# EAGLE board coqui-dip-simple (EAGLE 7.1.0)
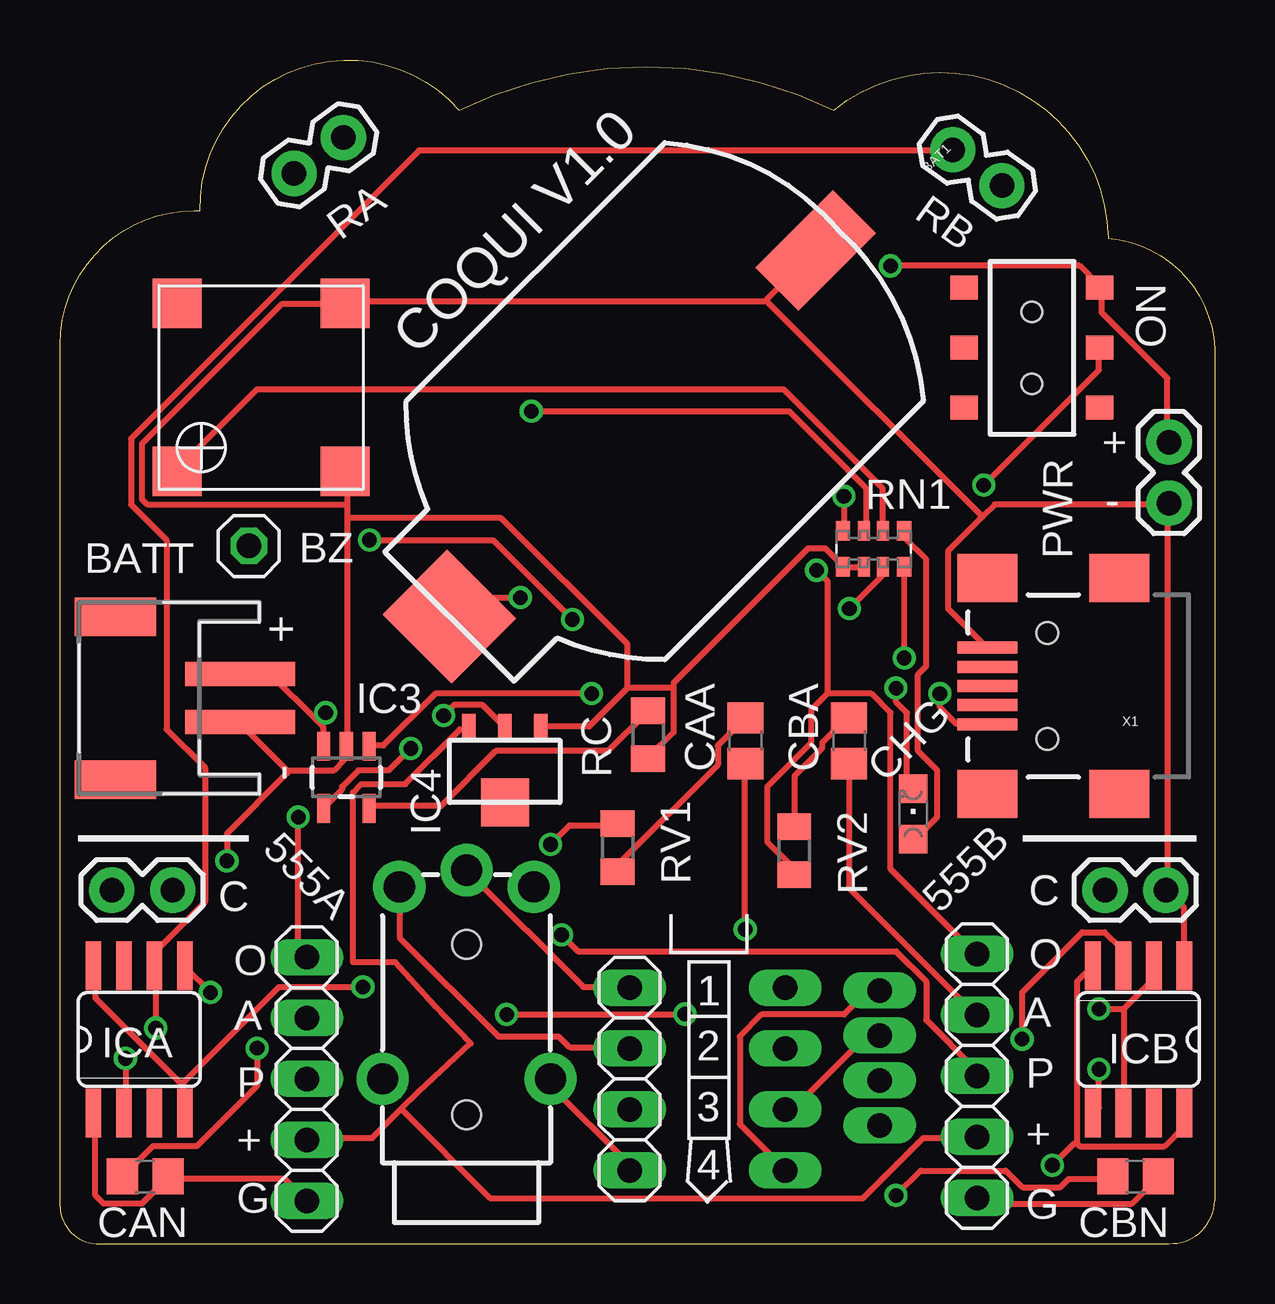
[diagram p0: board, top side]
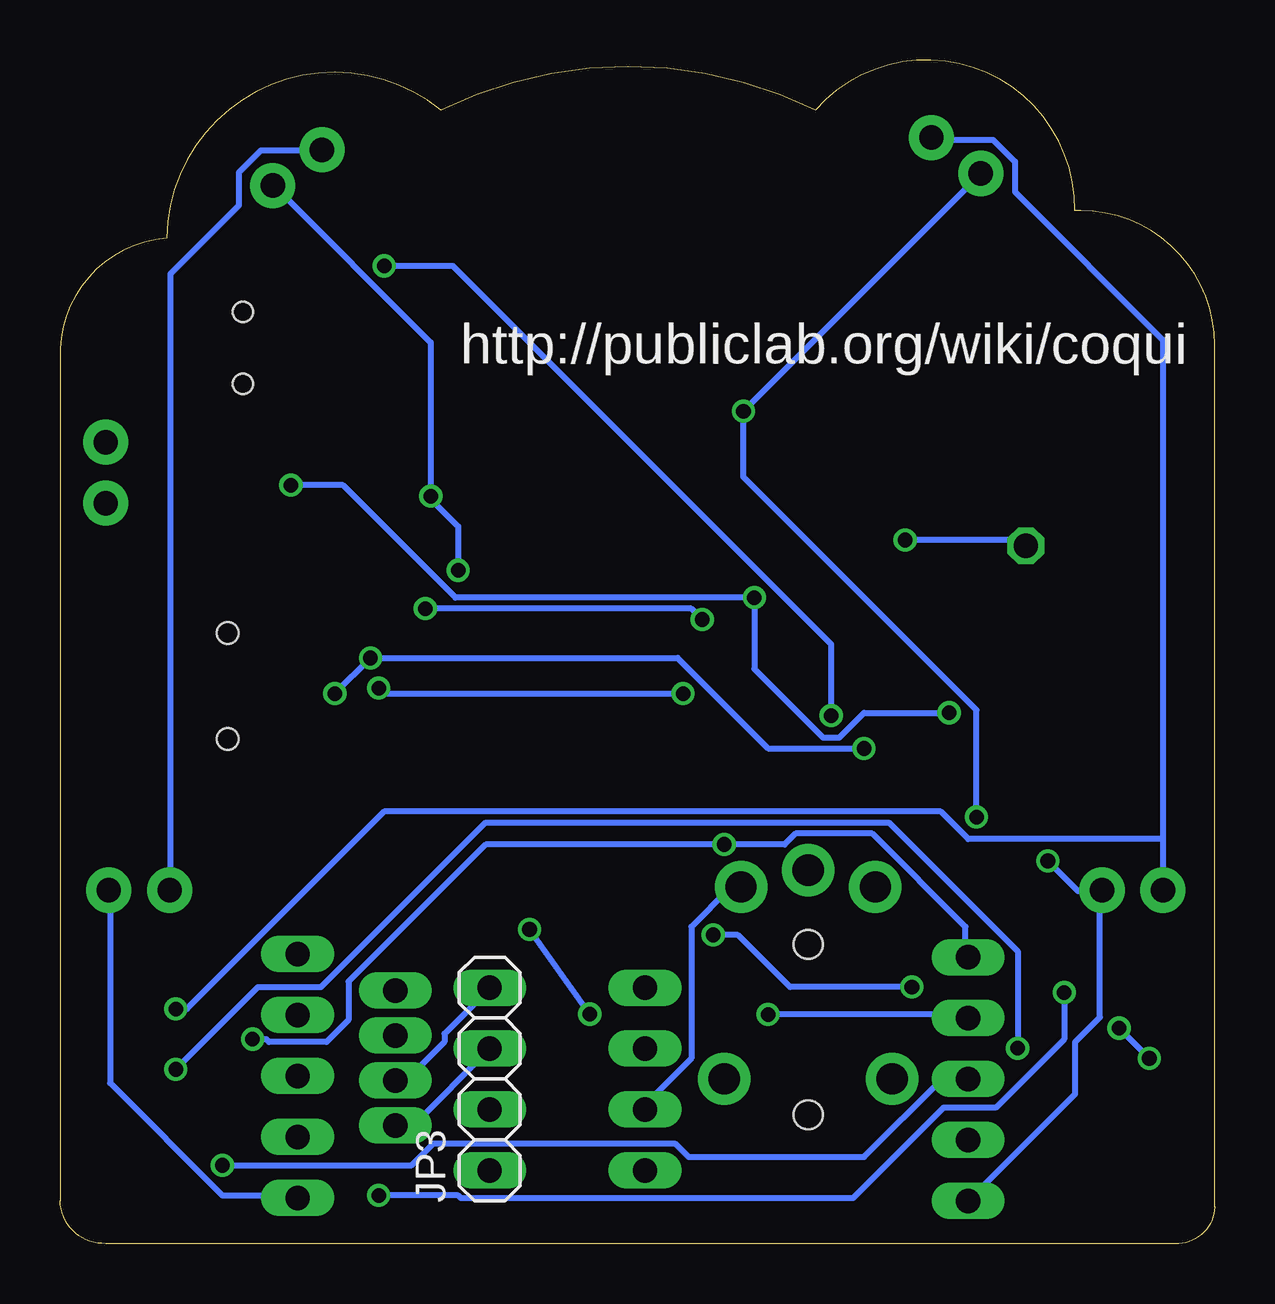
[diagram p1: board, bottom side, seen from below]

Size 48.13 x 49.34 mm. Coordinates in mm from the lower left corner, seen from the top.
Outline: 5.84,43.05 arc-140 16.64,47.24 arc-52 32.26,47.24 arc-128 43.69,41.91 arc-88 48.13,36.83 48.13,1.78 arc-90 46.23,0 1.65,0 arc-90 0,1.52 0,37.46 arc-90 5.59,43.05 5.84,43.05
Copper layers (1*16): Top 0.0356mm / dielectric 1.5011mm / Bottom 0.0356mm
Design rules "oshpark-2layer": minimum track width 6mil, minimum drill 13mil, track to track 6mil, track to pad 6mil, pad to pad 6mil, via to via 6mil, smd to smd 6mil, copper to edge 15mil, drill to drill 6mil, minimum pad ring 7mil, minimum via ring 7mil, stop-mask expansion 4mil, vias tented up to drill 0mil, thermal gap 10mil
Net classes: 0 default: width 0.254 mm, clearance 0.203 mm; 1 power: width 0.254 mm, clearance 0.178 mm

## Footprints (pad centres in the part's own frame; a part is rotated, then mirrored left to right if it is on the bottom)
BATTCOM_20MM_PTH_SMT = smd 4.572 x 2.54: P$1 0,0 | smd 3.81 x 4.064: P$2 21.59,0
JST-PH-2-SMT-RA = smd 1 x 4.6: 1 1,-3.7; 2 -1,-3.7 | smd 1.6 x 3.4: NC1 -3.4,1.5; NC2 3.4,1.5
1X01 = drill 1.016 octagon: 1 0,0
1X02 = drill 1.016 pad 1.88: 1 0,0; 2 2.54,0
C0805 = smd 1.3 x 1.5: 1 -0.95,0; 2 0.95,0
CHIPLED_0805 = smd 1.2 x 1.2: A 0,-1.05; C 0,1.05
SOT23-5 = smd 0.55 x 1.2: 1 -0.95,-1.3; 2 0,-1.3; 3 0.95,-1.3; 4 0.95,1.3; 5 -0.95,1.3
SOT89 = smd 0.58 x 1.2: 1 -1.5,-1.8; 2 0,-1.8; 3 1.5,-1.8 | smd 2 x 2: 4 0,1.3
SO08 = smd 0.66 x 2.032: 1 -1.905,-3.073; 2 -0.635,-3.073; 3 0.635,-3.073; 4 1.905,-3.073; 5 1.905,3.073; 6 0.635,3.073; 7 -0.635,3.073; 8 -1.905,3.073
AYZ0202 = smd 1 x 1.15: 1 -2.5,2.825; 2 0,2.825; 3 2.5,2.825; 4 -2.5,-2.825; 5 0,-2.825; 6 2.5,-2.825 | hole 0.85: 1.5,0; -1.5,0
MJ-2135 = drill 1.3 pad 2.184: 1 0,8.5; 1@2 7,8.5; 2 0.7,0.5; 3 6.3,0.5; 4 3.5,-0.2 | hole 1.2: 3.5,2.9; 3.5,10
1X04/90 = drill 1.016 long: 1 2.928,-2.286; 2 1.053,-2.286; 3 -2.697,-2.286; 4 -0.822,-2.286
1X04 = drill 1.016 long: 1 -3.81,0; 2 -1.27,0; 3 1.27,0; 4 3.81,0
1X05 = drill 1.016 long: 1 -5.08,0; 2 -2.54,0; 3 0,0; 4 2.54,0; 5 5.08,0
R0805 = smd 1.1 x 1.4: 1 -1,0; 2 1,0
EXB38V = smd 0.6 x 0.8: 1 -1.275,-0.75; 4 1.275,-0.75; 5 1.275,0.75; 8 -1.275,0.75 | smd 0.5 x 0.8: 2 -0.4,-0.75; 3 0.4,-0.75; 6 0.4,0.75; 7 -0.4,0.75
SMT-8585-BUZZER = smd 2.05 x 2.05: + -3.5,-3.5; - 3.5,-3.5; A- 3.5,3.5; NC1 -3.5,3.5
USB-MINIB = smd 2.5 x 0.5: D+ 2.5,0; D- 2.5,0.8; GND 2.5,-1.6; ID 2.5,-0.8; VBUS 2.5,1.6 | smd 2.5 x 2: GND@1 -3,-4.5; GND@2 -3,4.5; GND@3 2.5,4.5; GND@4 2.5,-4.5 | hole 0.9: 0,2.2; 0,-2.2

## Placement (x,y rotation side)
BAT1  LIR2032  [BATTCOM_20MM_PTH_SMT]  31.5,41.4 225 top
BATT  [JST-PH-2-SMT-RA]  3.81,22.73 90 top
BZ  [1X01]  7.87,29.08 0 top
CA  M02PTH  [1X02]  4.7,14.73 180 top
CAA  0.01uF  [C0805]  28.58,20.96 90 top
CAN  0.01uF  [C0805]  3.56,2.79 180 top
CB  M02PTH  [1X02]  46.1,14.73 180 top
CBA  0.01uF  [C0805]  32.89,20.96 90 top
CBN  0.01uF  [C0805]  44.83,2.79 180 top
CHG  0805  [CHIPLED_0805]  35.56,17.91 0 top
IC3  MCP73831  [SOT23-5]  11.94,19.43 180 top
IC4  MCP1700-33  [SOT89]  18.54,19.69 180 top
ICA  LM555D  [SO08]  3.3,8.51 0 top
ICB  LM555D  [SO08]  44.96,8.51 180 top
J1  AYZ0202  [AYZ0202]  40.51,37.34 270 top
J-FEMALE  MJ-2135  [MJ-2135]  20.45,15.37 180 top
JP1  [1X04/90]  31.88,7.62 90 top
JP3  [1X04]  30.23,6.86 90 bottom
JP4  [1X04]  23.75,6.86 90 top
JP5  [1X05]  10.29,6.86 90 top
JP6  [1X05]  38.23,6.98 90 top
PWR  M02PTH  [1X02]  46.23,33.4 270 top
RA  M02PTH  [1X02]  11.81,46.1 216 top
RB  M02PTH  [1X02]  37.21,45.59 324 top
RC  22K  [R0805]  24.51,21.21 90 top
RN1  [EXB38V]  33.91,28.96 180 top
RV1  22K  [R0805]  23.24,16.51 90 top
RV2  22K  [R0805]  30.61,16.38 270 top
U$1  BUZZER  [SMT-8585-BUZZER]  8.38,35.69 0 top
X1  USBSMD  [USB-MINIB]  41.15,23.24 180 top

## Library data of the parts
BAT1 IC3 J1 = SparkFunNew
BATT IC4 ICA ICB U$1 = adafruit
BZ JP3-JP6 = pinhead
CA CB PWR RA RB = SparkFun-Connectors
CAA CAN CBA CBN = rcl
CHG = led
J-FEMALE = iPhoneSoftModem
JP1 = trrs-dwb
RC RV1 RV2 = adafruit2013
RN1 = resistor-dil; OC_FARNELL: unknown; OC_NEWARK: unknown
X1 = SparkFun

## Nets
AOUT: ICB.3 JP5.5 RA.2 RN1.3 RV1.2
BOUT: JP6.5 RB.2 RN1.4 RV2.2
GND: BAT1.P$1 BATT.2 CA.1 CAN.1 CB.1 CBN.1 IC3.2 IC4.1 ICA.1 ICB.1 JP5.1 JP6.1 PWR.2 RC.1 RN1.5 RN1.6 U$1.- U$1.A- X1.GND
N$1: J-FEMALE.1 JP4.1
N$2: J-FEMALE.2 JP4.2
N$3: IC3.5 RC.2
N$4: J-FEMALE.3 JP4.3
N$5: CHG.C IC3.1
N$6: J-FEMALE.4 JP4.4
N$7: BZ.1 RN1.7
N$8: CHG.A RN1.1
N$9: CAA.1 JP5.4
N$10: CAA.2 RV1.1
N$11: CA.2 ICB.2 ICB.6 RA.1
N$12: RN1.2 U$1.+
N$13: CBA.2 RV2.1
N$14: CAN.2 ICB.5
N$15: CBN.2 ICA.5
N$16: CB.2 ICA.2 ICA.6 RB.1
N$17: CBA.1 JP6.4
N$18: JP1.1 JP3.1
N$19: JP1.2 JP3.2
N$20: JP1.3 JP3.3
N$21: JP1.4 JP3.4
VAIN: ICB.4 ICB.8 JP5.3
VBAT [power]: BAT1.P$2 BATT.1 IC3.3 J1.2
VBIN: ICA.4 ICA.8 JP6.3
VBUS [power]: IC3.4 RN1.8 X1.VBUS
VCC: IC4.3 JP5.2 JP6.2
VDD: IC4.2 J1.1 PWR.1

## Tracks (layer width: path | path; a pad name or v marks a point on that pad's centre or on a via)
AOUT  (via drill 0.61)
  Top 0.254: v19.65,34.7 30.39,34.7 33.59,31.5 33.59,29.78 RN1.3 | v20.45,16.64 21.25,17.44 23.19,17.44 RV1.2 | v40.11,8.52 40.11,10.46 42.62,12.98 43.54,12.98 44.22,12.29 44.22,11.61 ICB.3 | v9.93,17.78 9.93,12.29 JP5.5
  Bottom 0.254: RA.2 9.82,44.53 v19.65,34.7 19.65,31.95 9.93,22.24 v9.93,17.78 | JP5.5 10.39,11.95 10.39,13.21 14.28,17.09 17.48,17.09 17.93,16.64 v20.45,16.64 30.39,16.64 36.11,10.92 36.11,9.32 37.02,8.41 39.42,8.41 39.53,8.52 v40.11,8.52
BOUT  (via drill 0.61)
  Top 0.254: 31.99,22.92 31.31,22.24 31.31,20.87 29.48,19.04 29.48,16.75 30.51,15.72 30.51,15.49 RV2.2 | 31.99,22.92 33.82,22.92 34.62,22.12 34.62,15.61 38.16,12.06 JP6.5 | v32.68,31.15 32.68,29.78 RN1.4 | 31.99,22.92 31.99,27.61 v31.53,28.07
  Bottom 0.254: RB.2 39.19,44.07 32.68,37.55 v32.68,31.15 32.68,31.04 31.53,29.9 v31.53,28.07
GND  (via drill 0.61)
  Top 0.254: JP5.1 10.27,1.78 9.36,2.69 4.56,2.69 CAN.1 4.45,2.69 3.42,1.66 1.82,1.66 1.47,2.01 1.47,5.44 ICA.1 | 9.47,19.72 11.42,19.72 11.87,20.18 11.87,20.64 IC3.2 11.99,20.75 11.99,30.24 | 9.47,19.72 7.53,21.67 BATT.2 | 11.99,30.24 11.99,30.81 | 11.99,30.81 11.99,32.18 U$1.- | RN1.6 33.48,28.18 32.68,28.18 RN1.5 32.56,28.3 31.88,28.98 31.19,28.98 25.59,23.38 25.59,23.15 | 25.59,23.15 25.59,21.32 24.56,20.3 RC.1 | 23.65,23.15 22.05,21.55 20.1,21.55 IC4.1 | 25.59,23.15 23.65,23.15 | 11.99,30.24 18.39,30.24 23.65,24.98 23.65,23.15 | v6.96,15.95 6.96,17.09 9.47,19.61 9.47,19.72 | 29.36,39.27 11.99,39.27 U$1.A- 11.76,39.15 9.25,39.15 3.42,33.32 3.42,31.04 3.65,30.81 11.99,30.81 | BAT1.P$1 29.36,39.27 | CBN.1 45.71,2.69 44.68,1.66 38.51,1.66 38.28,1.89 JP6.1 | ICB.1 46.85,11.61 46.85,14.01 46.16,14.69 CB.1 46.16,14.81 46.16,30.7 PWR.2 46.16,30.81 38.96,30.81 38.45,30.3 | 38.45,30.3 37.02,28.87 37.02,26.47 38.62,24.87 X1.GND | 38.45,30.3 29.48,39.27 29.36,39.27
  Bottom 0.254: JP5.1 10.27,1.78 5.82,6.24 5.82,8.41 4.79,9.44 4.79,14.69 CA.1 4.9,14.69 5.7,14.69 v6.96,15.95 | JP6.1 38.28,2.01 41.36,2.01 46.05,6.69 46.05,14.69 CB.1
N$1
  Top 0.254: J-FEMALE.1 20.45,6.58 23.65,3.38 23.65,3.15 JP4.1
N$2
  Bottom 0.254: JP4.2 23.65,5.66 23.65,5.89 21.82,7.72 21.82,13.21 20.22,14.81 19.76,14.81 J-FEMALE.2
N$3
  Top 0.254: IC3.5 12.9,18.24 15.88,18.24 18.16,20.52 22.85,20.52 24.45,22.12 RC.2
N$4
  Top 0.254: JP4.3 23.65,8.18 21.25,8.18 20.79,8.64 18.27,8.64 14.16,12.75 14.16,14.81 J-FEMALE.3
N$5  (via drill 0.61)
  Top 0.254: v22.16,22.92 15.65,22.92 13.47,20.75 12.9,20.75 IC3.1 | v34.85,23.15 34.85,22.58 35.31,22.12 35.31,19.27 35.53,19.04 CHG.C
  Bottom 0.254: v22.16,22.92 34.62,22.92 v34.85,23.15
N$6
  Top 0.254: JP4.4 23.65,10.69 21.82,10.69 17.02,15.49 J-FEMALE.4
N$7  (via drill 0.61)
  Top 0.254: v32.91,26.47 34.28,27.84 34.28,28.18 RN1.7 | v21.36,26.01 18.05,29.32 v12.9,29.32
  Bottom 0.254: v32.91,26.47 21.82,26.47 v21.36,26.01 | v12.9,29.32 8.1,29.32 BZ.1
N$8
  Top 0.254: RN1.1 35.19,29.67 35.19,29.44 36.11,28.52 36.11,24.07 35.76,23.72 35.76,20.52 36.56,19.72 36.56,17.78 35.65,16.87 CHG.A
N$9  (via drill 0.61)
  Top 0.254: v28.56,13.09 28.56,19.95 CAA.1 | v26.05,9.56 25.02,9.55 v18.62,9.55
  Bottom 0.254: v26.05,9.56 v28.56,13.09 | v18.62,9.55 10.5,9.55 10.39,9.44 JP5.4
N$10
  Top 0.254: RV1.1 23.3,15.61 23.3,15.84 27.42,19.95 27.42,20.75 28.56,21.9 CAA.2
N$11  (via drill 0.61)
  Top 0.254: 44.34,9.78 ICB.6 | 44.34,9.78 45.59,11.04 ICB.2 | v43.31,9.78 44.34,9.78
  Bottom 0.254: 2.16,16.87 2.16,37.67 8.33,43.84 8.33,45.1 9.25,46.01 11.76,46.01 RA.1 | 2.16,16.87 CA.2 | v43.31,9.78 42.85,9.78 34.62,18.01 11.42,18.01 10.27,16.87 2.16,16.87
N$12
  Top 0.254: RN1.2 34.28,29.78 34.28,31.5 30.16,35.61 8.22,35.61 4.9,32.3 U$1.+
N$13
  Top 0.254: RV2.1 30.62,17.44 30.62,19.5 31.76,20.64 31.76,20.87 32.79,21.9 CBA.2
N$14  (via drill 0.61)
  Top 0.254: v8.22,8.14 8.22,6.58 5.7,4.06 3.87,4.06 2.62,2.81 CAN.2 | v43.31,7.26 43.31,5.66 43.08,5.44 ICB.5
  Bottom 0.254: v8.22,8.14 8.22,12.18 13.59,17.55 30.39,17.55 37.25,10.69 39.88,10.69 v43.31,7.26
N$15  (via drill 0.61)
  Top 0.254: v34.85,2.01 35.88,3.04 39.42,3.04 40.11,2.35 41.71,2.35 42.05,2.69 43.88,2.69 CBN.2 | v6.27,10.46 5.25,11.49 ICA.5
  Bottom 0.254: v34.85,2.01 31.53,2.01 31.42,1.89 15.07,1.89 11.3,5.66 9.13,5.66 6.27,8.52 v6.27,10.46
N$16  (via drill 0.61)
  Top 0.254: v2.73,7.72 2.73,5.44 ICA.2 | v3.99,8.98 3.99,11.49 ICA.6 3.99,11.61 3.99,12.18 6.04,14.24 6.04,19.84 4.45,21.44 4.45,29.32 2.96,30.81 2.96,33.55 14.96,45.55 37.13,45.55 RB.1
  Bottom 0.254: v3.99,8.98 v2.73,7.72 | CB.2 43.54,14.81 43.54,40.41 40.68,43.27 40.68,44.64 39.76,45.55 37.25,45.55 RB.1
N$17
  Top 0.254: CBA.1 32.91,19.95 32.91,14.81 38.16,9.55 JP6.4
N$18
  Top 0.254: JP3.1 30.16,3.15 28.33,4.98 28.33,8.64 29.25,9.55 32.68,9.55 33.59,10.46 34.16,10.46 JP1.1
N$19
  Top 0.254: JP3.2 30.28,5.66 30.62,5.66 33.59,8.64 34.16,8.64 JP1.2
N$20
  Bottom 0.254: JP1.3 34.16,4.98 33.36,4.98 30.28,8.06 JP3.3
N$21
  Bottom 0.254: JP1.4 34.16,6.81 33.71,6.81 32.11,8.41 32.11,8.75 30.28,10.58 JP3.4
VAIN  (via drill 0.61)
  Top 0.254: 42.39,4.18 42.51,4.06 46.05,4.06 46.85,4.86 46.85,5.44 ICB.8 | 42.39,4.18 42.39,10.92 ICB.4 | v41.36,3.26 42.28,4.18 42.39,4.18
  Bottom 0.254: v41.36,3.26 33.48,3.26 32.56,4.18 22.5,4.18 21.93,3.61 14.62,3.61 11.42,6.81 10.39,6.81 JP5.3
VBAT  (via drill 0.61)
  Top 0.254: 10.67,21.84 8.79,23.72 7.53,23.72 BATT.1 | 10.67,21.84 10.96,21.55 10.96,20.75 IC3.3 | v38.51,31.61 43.31,36.41 43.31,37.32 J1.2 | v19.19,26.92 17.02,26.92 BAT1.P$2 | 10.67,21.84 10.96,22.12 v11.07,22.12
  Bottom 0.254: v38.51,31.61 36.34,31.61 31.65,26.92 v19.19,26.92 19.19,23.95 16.33,21.1 15.65,21.1 14.62,22.12 v11.07,22.12
VBIN  (via drill 0.61)
  Top 0.254: 5.13,6.58 5.13,5.44 ICA.4 | 5.13,6.58 1.47,10.24 1.47,11.49 ICA.8 | v20.9,12.87 21.59,12.18 34.85,12.18 36.11,10.92 36.11,9.32 38.16,7.26 38.16,7.04 JP6.3 | v12.62,10.69 9.13,10.69 5.13,6.69 5.13,6.58
  Bottom 0.254: v20.9,12.87 19.88,12.87 17.7,10.69 v12.62,10.69
VBUS  (via drill 0.61)
  Top 0.254: v35.19,24.41 35.19,28.18 RN1.8 | v36.68,22.92 36.68,22.35 37.36,21.67 38.62,21.67 X1.VBUS | v14.62,20.64 13.7,19.72 12.45,19.72 11.76,19.04 11.76,18.92 11.07,18.24 IC3.4
  Bottom 0.254: v36.68,22.92 v35.19,24.41 22.39,24.41 18.62,20.64 v14.62,20.64
VCC
  Top 0.254: 14.22,5.61 13.02,4.41 10.39,4.41 JP5.2 | 14.22,5.61 14.96,6.35 17.12,8.34 15.62,9.91 13.97,11.72 12.22,11.72 12.22,18.81 12.56,19.15 14.39,19.15 16.68,21.44 17.02,21.44 IC4.3 | 14.22,5.61 17.93,1.89 33.48,1.89 35.99,4.41 38.16,4.41 JP6.2
VDD  (via drill 0.61)
  Top 0.254: PWR.1 46.16,33.44 46.16,36.07 43.42,38.81 43.42,39.73 J1.1 43.31,39.95 42.51,40.75 v34.62,40.75 | v15.99,22.01 16.45,22.47 17.59,22.47 18.5,21.55 IC4.2
  Bottom 0.254: v15.99,22.01 15.99,24.98 31.76,40.75 v34.62,40.75

## Text on the board
tPlace: ON | COQUI V1.0 | + | - | IC3 | IC4 | 555A | C | 555B | C | O | O | 1 | A | A | 2 | P | P | 3 | + | + | 4 | G | G
bPlace: http://publiclab.org/wiki/coqui